# Altium PCB PCB1.PcbDoc
Units mm, origin at the board's own origin, x right, y up, seen from the top; angles counter-clockwise.
Board outline 136.53 x 82.17 mm, 4 copper layers (Top Layer, Layer 1, Layer 2, Bottom Layer), stack 0.603 mm thick; 26 components, 33 nets, 136 pads, 20 vias.
Unrouted connection lines stored in the file: 7.
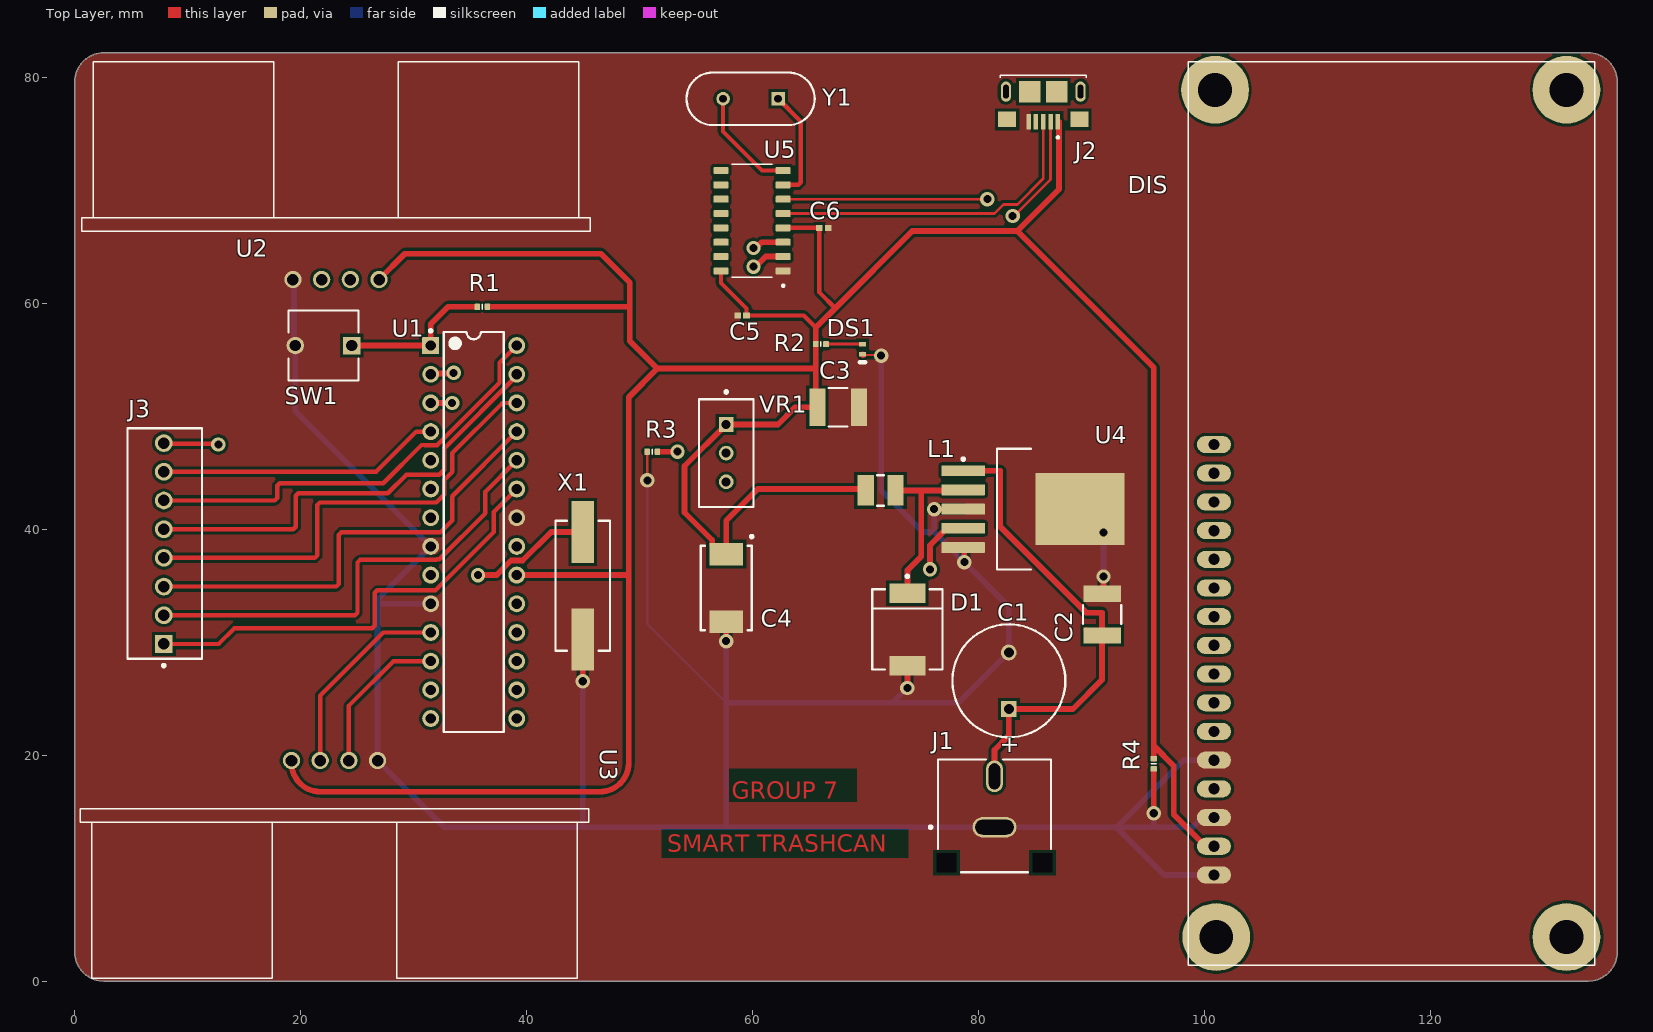
[diagram p0: Top Layer view]
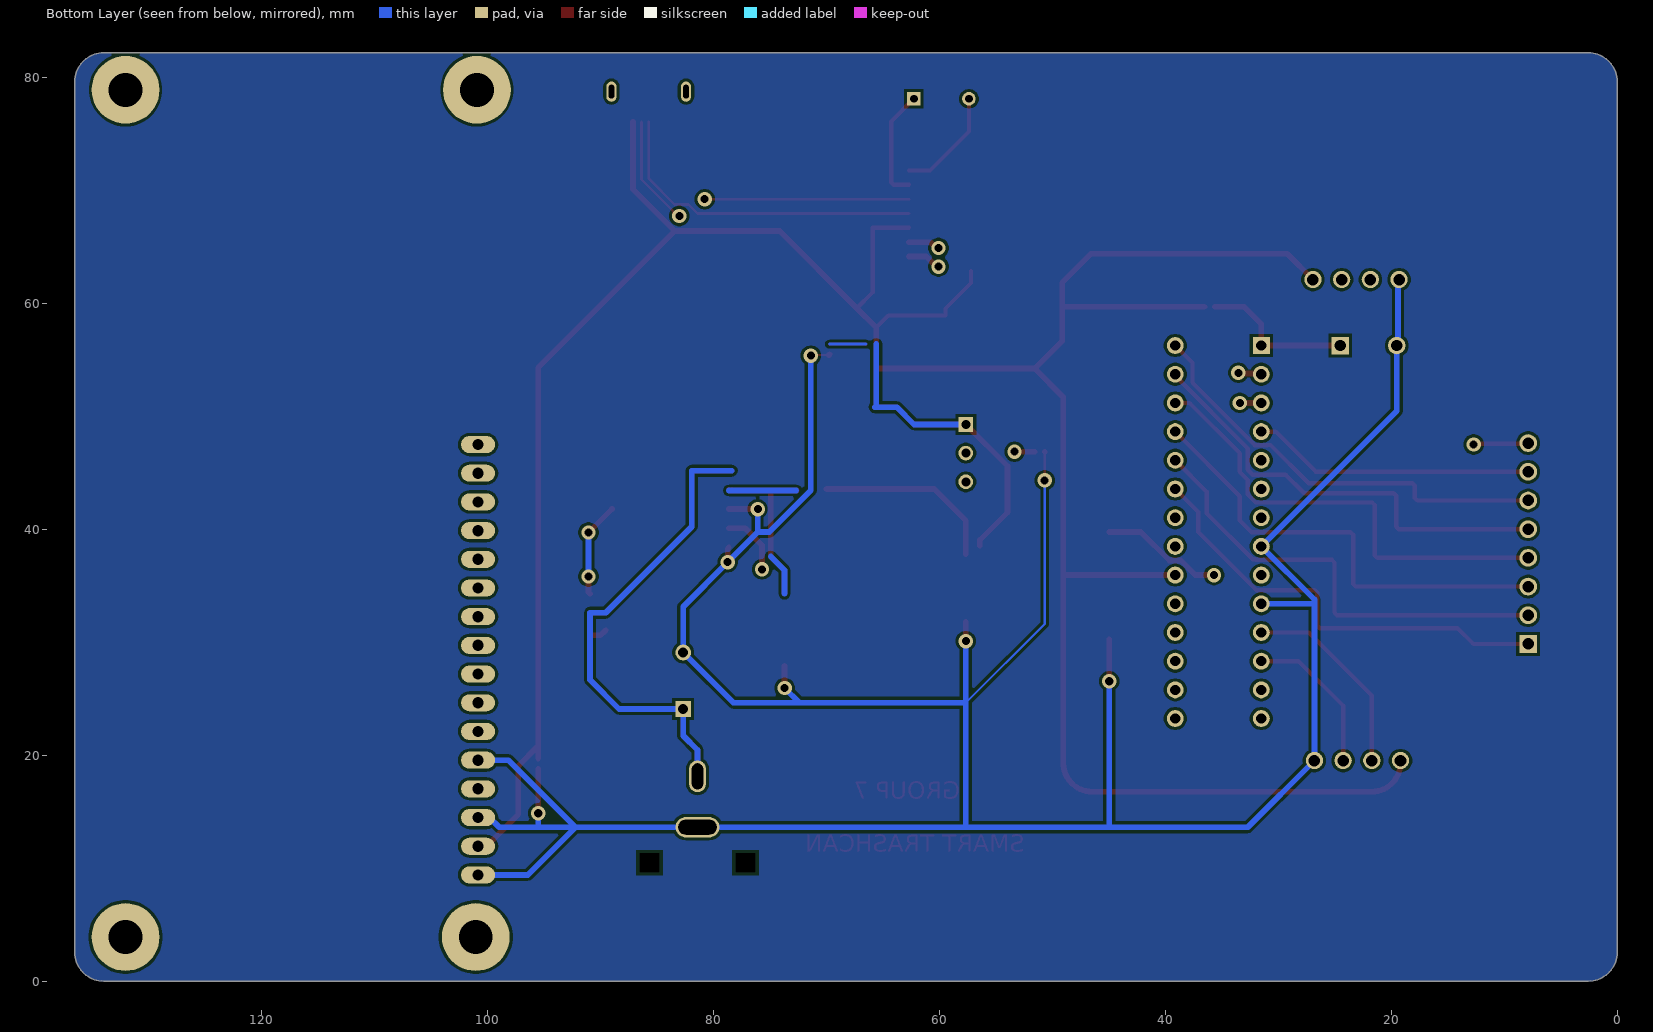
[diagram p1: Bottom Layer view, seen from below]
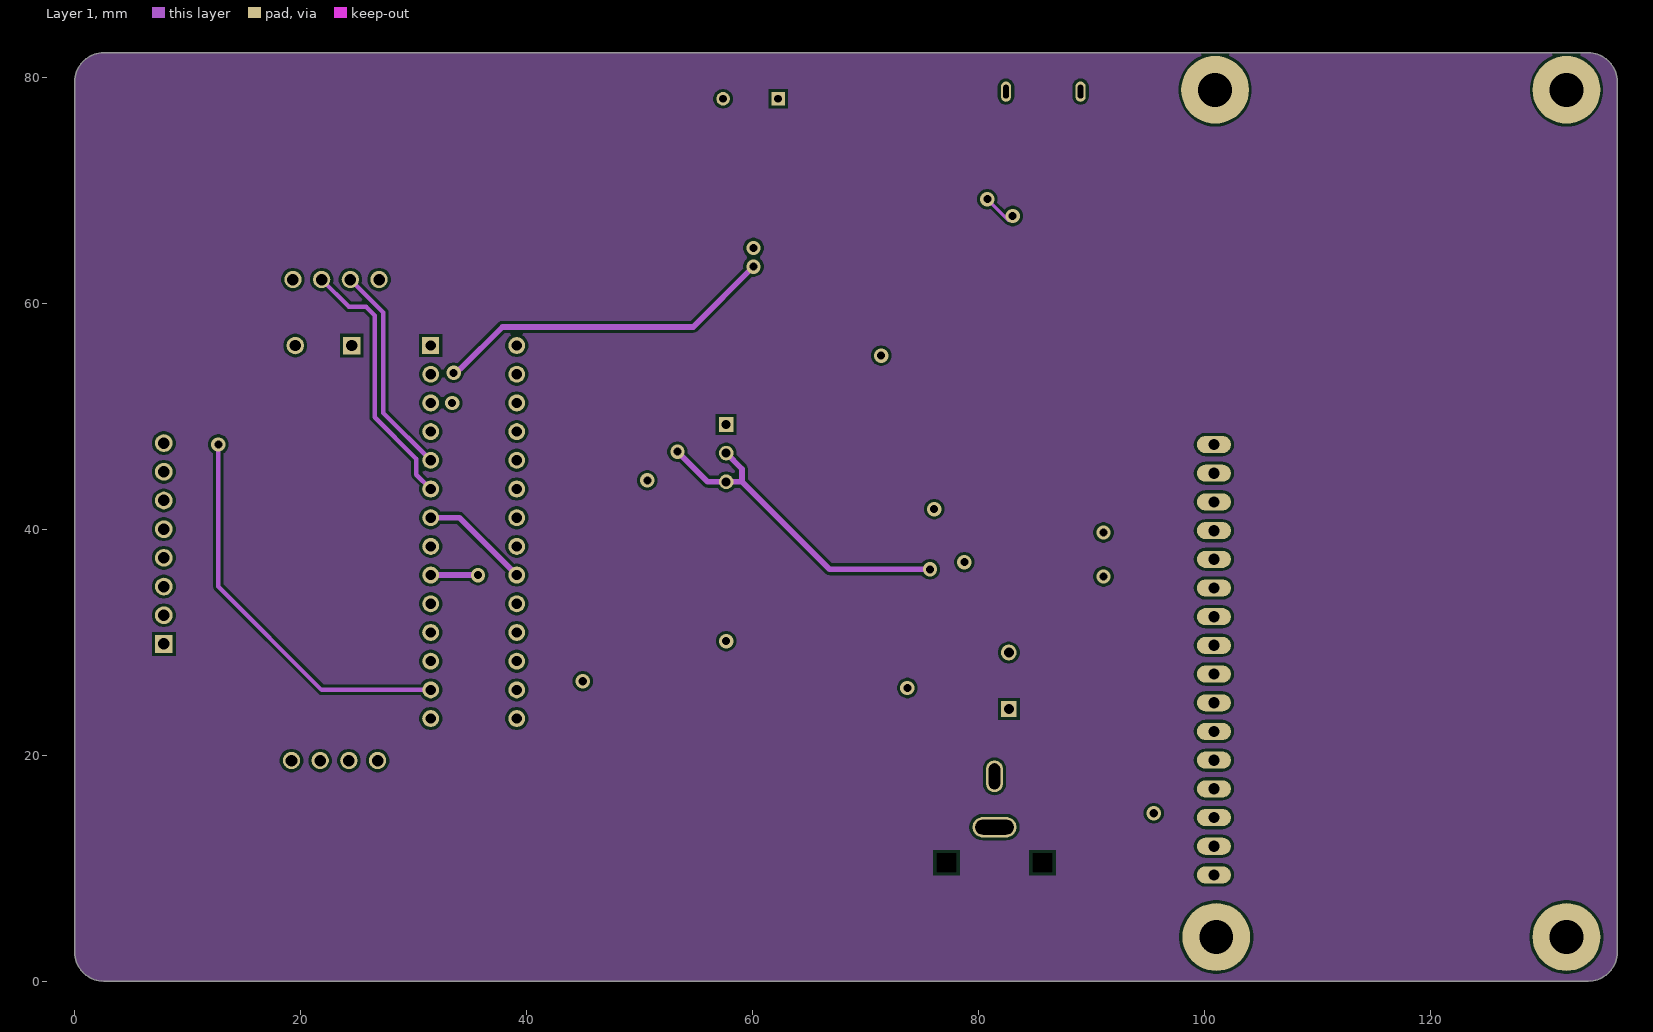
[diagram p2: Layer 1]
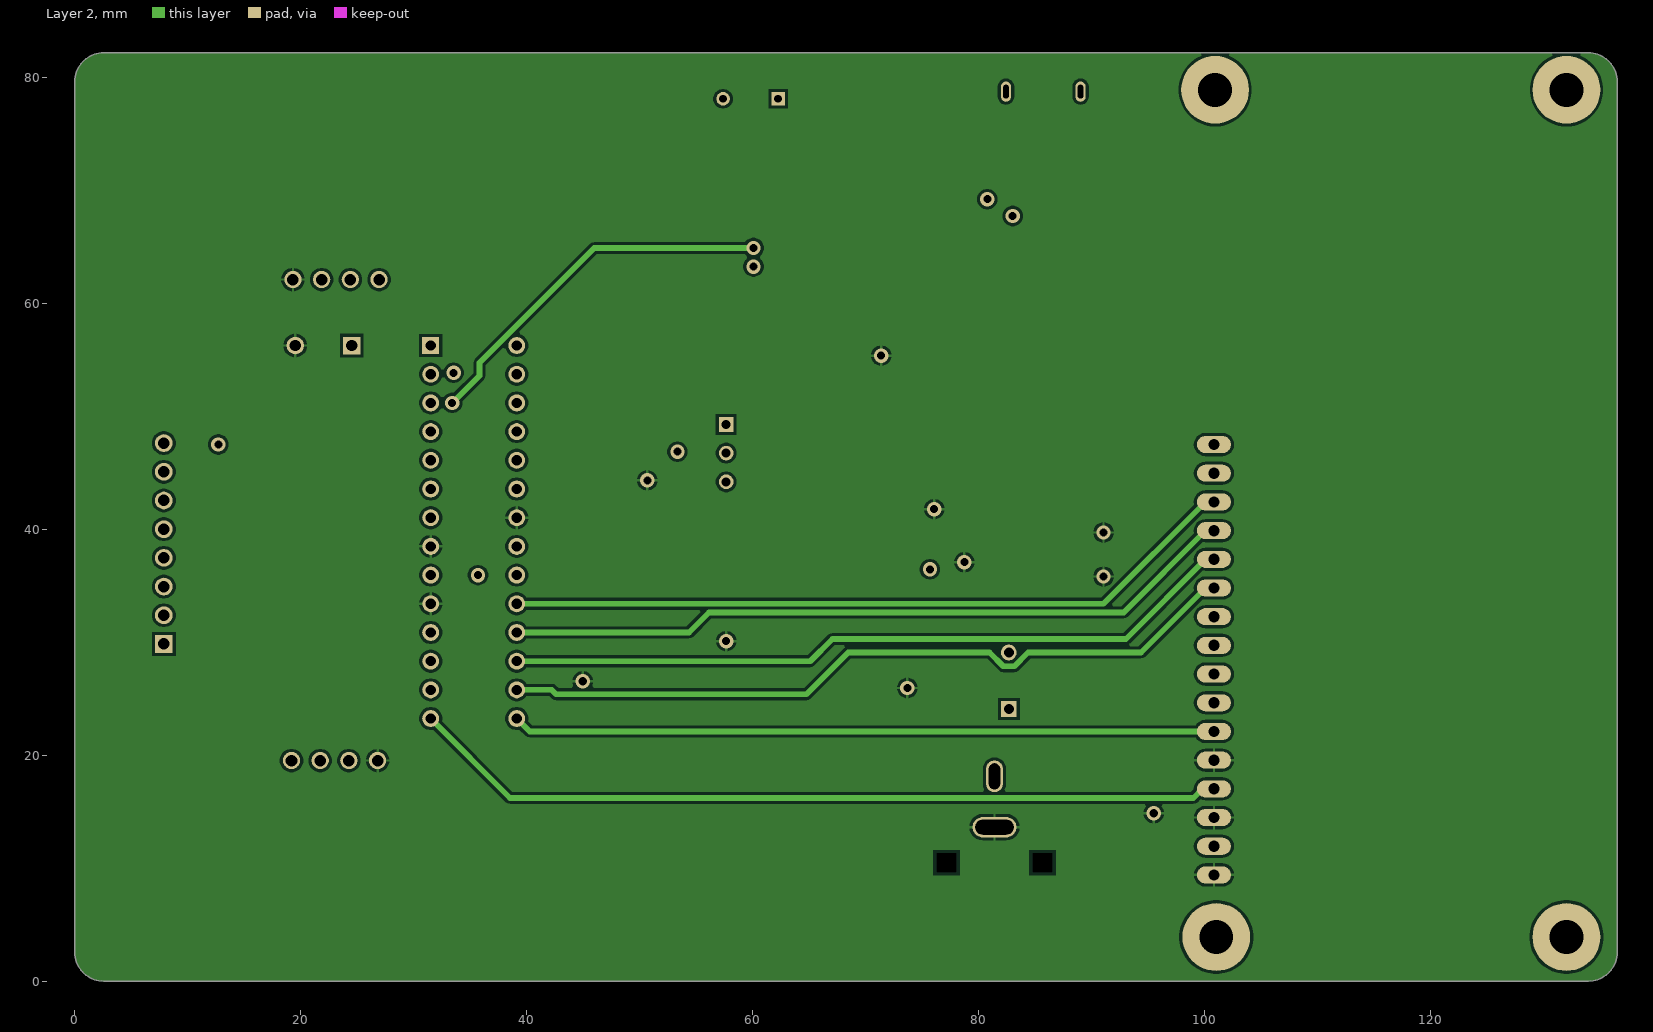
[diagram p3: Layer 2]
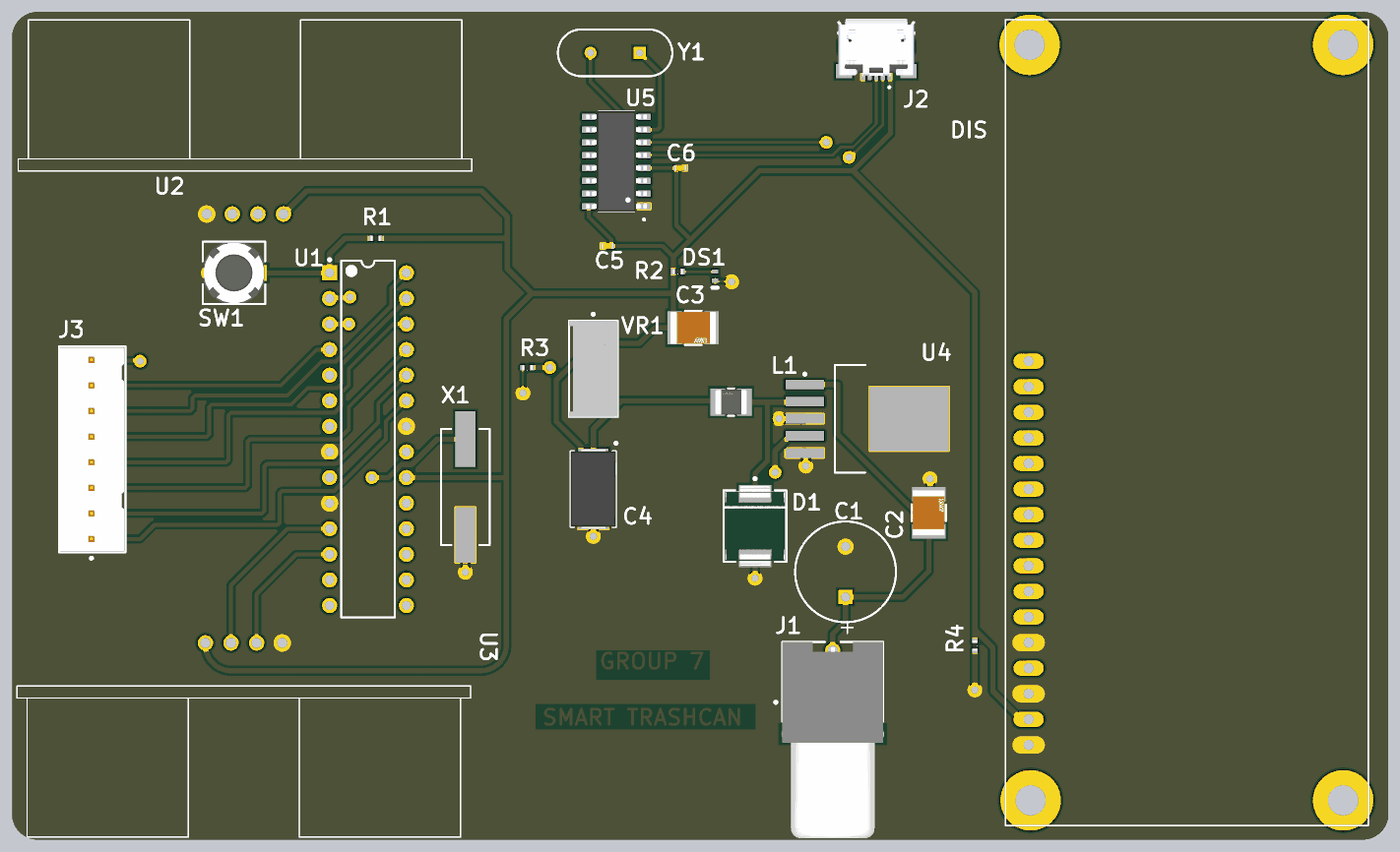
[diagram p4: 3D render of the assembled board from above, using the file's embedded part models]

## Layer stack, top to bottom
Top Solder: solder mask 0.0102, Solder Resist, Dk 3.5
Top Layer: signal copper 0.0356
Dielectric 2: prepreg 0.0711, PP-006, Dk 4.1
Layer 1: signal copper 0.035
Dielectric 1: dielectric 0.32, FR-4, Dk 4.8
Layer 2: signal copper 0.035
Dielectric 3: prepreg 0.0711, PP-006, Dk 4.1
Bottom Layer: signal copper 0.0356
Bottom Solder: solder mask 0.0102, Solder Resist, Dk 3.5

## Board outline
0,79.629 cw(c2.54,79.629) 2.54,82.169 133.985,82.169 cw(c133.985,79.629) 136.525,79.629 136.525,2.54 cw(c133.985,2.54) 133.985,0 2.54,0 cw(c2.54,2.54) 0,2.54 0,11.684

## Design rules (kind name [scope] priority, off if disabled: settings)
Clearance [All] p1: gap=0.254 ignorepadtopadclearanceinfootprint=TRUE
PolygonConnect PolygonConnect_10 [All vs IsNamedPolygon('GND_L01_P011')] p1: connectstyle=Direct reliefconductorwidth=0.254 reliefentries=4 polygonreliefangle="90 Angle" airgapwidth=0.254
PolygonConnect PolygonConnect_9 [All vs IsNamedPolygon('GND_L04_P006')] p2: connectstyle=Direct reliefconductorwidth=0.254 reliefentries=4 polygonreliefangle="90 Angle" airgapwidth=0.254
PolygonConnect PolygonConnect_8 [All vs IsNamedPolygon('GND_L03_P013')] p3: connectstyle=Direct reliefconductorwidth=0.254 reliefentries=4 polygonreliefangle="90 Angle" airgapwidth=0.254
PolygonConnect PolygonConnect_7 [All vs IsNamedPolygon('GND_L02_P012')] p4: connectstyle=Direct reliefconductorwidth=0.254 reliefentries=4 polygonreliefangle="90 Angle" airgapwidth=0.254
PolygonConnect PolygonConnect_6 [All vs IsNamedPolygon('GND_L02_P007')] p5: connectstyle=Direct reliefconductorwidth=0.254 reliefentries=4 polygonreliefangle="90 Angle" airgapwidth=0.254
PolygonConnect PolygonConnect_5 [All vs IsNamedPolygon('GND_L03_P008')] p6: connectstyle=Direct reliefconductorwidth=0.254 reliefentries=4 polygonreliefangle="90 Angle" airgapwidth=0.254
PolygonConnect PolygonConnect_4 [All vs IsNamedPolygon('NONET_L01_P000')] p7: connectstyle=Direct reliefconductorwidth=0.254 reliefentries=4 polygonreliefangle="90 Angle" airgapwidth=0.254
PolygonConnect PolygonConnect_3 [All vs IsNamedPolygon('GND_L04_P006')] p8: connectstyle=Direct reliefconductorwidth=0.254 reliefentries=4 polygonreliefangle="90 Angle" airgapwidth=0.254
PolygonConnect PolygonConnect_2 [All vs IsNamedPolygon('GND_L04_P003')] p9: connectstyle=Direct reliefconductorwidth=0.254 reliefentries=4 polygonreliefangle="90 Angle" airgapwidth=0.254
PolygonConnect PolygonConnect_1 [All vs IsNamedPolygon('NONET_L01_P000')] p10: connectstyle=Direct reliefconductorwidth=0.254 reliefentries=4 polygonreliefangle="90 Angle" airgapwidth=0.254
PolygonConnect [All] p11: connectstyle=Relief reliefconductorwidth=0.254 reliefentries=4 polygonreliefangle="90 Angle" airgapwidth=0.254
RoutingVias [All] p1: holewidth=0.711 width=1.27 viastyle="Through Hole" minholewidth=0.711 minwidth=1.27 maxholewidth=0.711 maxwidth=1.27
SolderMaskExpansion [All] p1: expansion=0.102 istentingtop=FALSE
SupplyNets "Schematic Supply Nets_1" [InNet('GND')] p1: voltage=0.000
UnRoutedNet [All] p1: checkbadconnections=TRUE
Width [All] p1: maxlimit=0.508 minlimit=0.254 preferedwidth=0.381
29 further rules are at their usual default settings.

## Components (designator, comment, footprint, x,y, rotation, side; value= is the part's Value field where it differs from the comment)
C1 "ECA-2AM101" CAPPR65-500-1600X1000X1700 82.677,26.583 r90 top value=100µF
C2 "100nF" FP-1812-L_4_5_0_3-W_3_2_0-IPC_C 90.932,32.448 r90 top
C3 "100nF" FP-1812-L_4_5_0_3-W_3_2_0-IPC_C 67.564,50.8 r0 top
C4 "TPSD227K010R0150" CAPMP7344X31-T_V 57.658,34.798 r270 top value=220µF
C5 "Capacitor 0.1 uF +/- 5% 16 V 0402" CAPC1005X56X25LL10T15 59.064,58.928 r0 top value=0.1µF
C6 "Capacitor 0.1 uF +/- 5% 16 V 0402" CAPC1005X56X25LL10T15 66.294,66.675 r180 top value=0.1µF
D1 "SS34" FP-95402-MFG 73.698,31.129 r270 top
DIS "LCD" 16026-16X2 98.538,1.398 r90 top
DS1 "LED" EVRL-0402-2_V 69.723,55.938 r270 top
J1 "RCJ-041" CUI-RCJ-041_V 81.407,13.625 r0 top
J2 "10118193-0001LF" AMPHENOL_10118193-0001LF 85.725,78.74 r180 top
J3 "HEADERS" FP-22-11-2082-MFG 7.949,38.74 r90 top
L1 "47uH" FP-LB3225-2_5-0_2-IPC_B 71.318,43.434 r180 top
R1 "10KR2F" RESC0402(1005)_L 36.068,59.69 r180 top value=10k
R2 "Resistor 330R +/-5 % 0402 63 mW" RESC0402(1005)_L 66.04,56.388 r180 top value=1k
R3 "Resistor 330R +/-5 % 0402 63 mW" RESC0402(1005)_L 51.112,46.863 r0 top value=330
R4 "10KR2F" RESC0402(1005)_L 95.504,19.246 r90 top value=10k
SW1 "EVQ11Y04K" FP-EVQ11Y04K-MFG 22.011,56.261 r180 top
U1 "ATmega328P-PU" 28P3 35.306,39.751 r0 top
U2 "HC-SR04" XCVR_HC-SR04 23.114,62.103 r180 top
U3 "HC-SR04" XCVR_HC-SR04 22.987,19.525 r0 top
U4 "LM2596S" KTT0005B_L 84.836,41.783 r0 top
U5 "CH340G" SOIC127P600X180-16N 59.944,67.31 r180 top
VR1 "3296W-1-103LF" BOUR-3296W 57.658,46.736 r270 top
X1 "16MHz" FOX-FOXSDLF160-20_V 44.958,35.001 r90 top
Y1 "12MHz" FOX-FOXSLF-2_V 59.817,78.105 r180 top

## Footprints (in the part's own frame and the unit in brackets; to place one, negate y for a bottom-side part, rotate by r counter-clockwise, add the part's x,y. Pads: shape width x height; smd on the part's side, far side on the other; paste and mask are expansions set on the pad)
28P3 [mm] "28-Pin Plastic Dual In-Line Package (PDIP)"
  rect 1.5x1.5 hole 0.9: 1(-3.81,16.51)
  round 1.5 hole 0.9: 2(-3.81,13.97) 3(-3.81,11.43) 4(-3.81,8.89) 5(-3.81,6.35) 6(-3.81,3.81) 7(-3.81,1.27) 8(-3.81,-1.27) 9(-3.81,-3.81) 10(-3.81,-6.35) 11(-3.81,-8.89) 12(-3.81,-11.43) 13(-3.81,-13.97) 14(-3.81,-16.51) 15(3.81,-16.51) 16(3.81,-13.97) 17(3.81,-11.43) 18(3.81,-8.89) 19(3.81,-6.35) 20(3.81,-3.81) 21(3.81,-1.27) 22(3.81,1.27) 23(3.81,3.81) 24(3.81,6.35) 25(3.81,8.89) 26(3.81,11.43) 27(3.81,13.97) 28(3.81,16.51)
  silkscreen extent -3.93,-17.7 2.65,17.93, body extent -3.6,-17.65 3.6,17.65, height 4.58
16026-16X2 [mm]
  round 6 hole 3: MNT1(2.5,-2.5) MNT2(77.5,-2.4) MNT3(2.5,-33.5) MNT4(77.5,-33.5)
  oval 1.508x3.016 hole 1: P$1(8,-2.3) P$2(10.54,-2.3) P$3(13.08,-2.3) P$4(15.62,-2.3) P$5(18.16,-2.3) P$6(20.7,-2.3) P$7(23.24,-2.3) P$8(25.78,-2.3) P$9(28.32,-2.3) P$10(30.86,-2.3) P$11(33.4,-2.3) P$12(35.94,-2.3) P$13(38.48,-2.3) P$14(41.02,-2.3) P$15(43.56,-2.3) P$16(46.1,-2.3)
  silkscreen extent 0,-36 80,0
AMPHENOL_10118193-0001LF [mm]
  rect 0.4x1.35 smd: 1(-1.3,2.675) 2(-0.65,2.675) 3(0,2.675) 4(0.65,2.675) 5(1.3,2.675)
  rect 1.6x1.4 smd: S1(-3.2,2.45) S2(3.2,2.45)
  rect 1.9x1.9 smd: S3(1.2,0) S4(-1.2,0)
  oval 0.9x1.8 hole 0.5 slot 1.2 at 90 deg: S5(-3.3,0) S6(3.3,0)
  silkscreen extent -3.8,-1.45 3.8,4.15, body extent -3.93,-2.76 3.93,2.95, height 2.85
BOUR-3296W [mm] "THD, 3-Leads, Body 9.53x4.83mm, Pitch 2.54mm"
  rect 1.3x1.3 hole 0.8: 1(-2.54,0)
  round 1.3 hole 0.8: 2(0,0) 3(2.54,0)
  silkscreen extent -5.54,-2.41 4.76,2.42, body extent -4.76,-2.4 4.76,2.42, height 11.55
CAPC1005X56X25LL10T15 [mm] "Chip Capacitor, 2-Leads, Body 1.10x0.60mm, IPC High Density"
  rect 0.58x0.54 smd: 1(-0.39,0) 2(0.39,0)
  body extent -0.55,-0.3 0.55,0.3, height 0.56
CAPMP7344X31-T_V [mm] "Molded Capacitor, 2-Leads, Body 7.50x4.5mm"
  rect 2x3 smd: 1(-3,0) 2(3,0)
  silkscreen extent -4.67,-2.25 3.75,2.38, body extent -3.97,-2.25 3.97,2.25, height 3.1
CAPPR65-500-1600X1000X1700 [mm] "THD, 2-Leads, Dia 10mm, Body Length 16mm"
  rect 1.4x1.4 hole 0.9: 1(-2.5,0)
  round 1.4 hole 0.9: 2(2.5,0)
  silkscreen extent -5,-5 5,5, body extent -5,-5 4.95,5, height 17
CUI-RCJ-041_V [mm] "Jack, 2-Leads, Body 19.5x10mm"
  oval 3.9x1.8 hole 1.3 slot 3.4 at 0 deg: 1(0,0)
  oval 1.5x2.8 hole 1 slot 2.3 at 90 deg: 2(0,4.5)
  round 0 hole 1.7 square unplated: MH1(-4.25,-3.15) MH2(4.25,-3.15)
  silkscreen extent -5.77,-4 5,6, body extent -5,-13.5 5,6, height 11.51
EVRL-0402-2_V [mm] "SMD, 2-Leads, Body 1x0.5mm"
  rect 0.4x0.6 smd: 1(-0.45,0) 2(0.45,0)
  silkscreen extent 1.15,-0.25 1.15,0.25, body extent -0.5,-0.25 0.5,0.25, height 0.25
FOX-FOXSDLF160-20_V [mm] "SMD, 2-Leads, Body 5x11.7mm, Height 4.5mm"
  rect 5.5x2 smd: 1(-4.75,0) 2(4.75,0)
  silkscreen extent -5.75,-2.41 5.75,2.41, body extent -6.6,-2.41 6.6,2.41, height 4.5
FOX-FOXSLF-2_V [mm] "THD, 2-Leads, Body 11.35x4.65mm, Pitch 4.88mm"
  rect 1.2x1.2 hole 0.7: 1(-2.44,0)
  round 1.2 hole 0.7: 2(2.44,0)
  silkscreen extent -5.68,-2.32 5.68,2.32, body extent -5.68,-2.33 5.68,2.33, height 3.6
FP-22-11-2082-MFG [mm]
  rect 1.57x1.57 hole 1.02 paste-2539.97 mask+0: 1(-8.895,0.075)
  round 1.57 hole 1.02 paste-2539.97 mask+0: 2(-6.355,0.075) 3(-3.815,0.075) 4(-1.275,0.075) 5(1.265,0.075) 6(3.805,0.075) 7(6.345,0.075) 8(8.885,0.075)
  silkscreen extent -10.93,-3.3 10.21,3.3, body extent -10.31,-3.4 10.31,3.4, height 0.25
FP-1812-L_4_5_0_3-W_3_2_0-IPC_C [mm]
  rect 1.423x3.306 smd paste+0 mask+0: 1(-1.841,0) 2(1.841,0)
  silkscreen extent -0.83,-1.7 0.83,1.7, body extent -2.65,-1.8 2.65,1.8, height 0.25
FP-95402-MFG [mm]
  rect 1.72x3.2 smd paste+0 mask+0: 1(-3.205,0) 2(3.205,0)
  silkscreen extent -4.82,-3.11 3.55,3.11, body extent -4.17,-3.21 4.17,3.21, height 0.25
FP-EVQ11Y04K-MFG [mm]
  rect 1.55x1.55 hole 1 paste-2539.97 mask+0: A(-2.5,0)
  round 1.55 hole 1 paste-2539.97 mask+0: B(2.5,0)
  silkscreen extent -3.1,-3.1 3.1,3.1, body extent -3.37,-3.2 3.37,3.2, height 0.25
FP-LB3225-2_5-0_2-IPC_B [mm]
  rect 1.454x2.706 smd paste+0 mask+0: 1(-1.326,0) 2(1.326,0)
  silkscreen extent -0.3,-1.35 0.3,1.35, body extent -2.3,-1.6 2.3,1.6, height 0.25
KTT0005B_L [mm] "DPAK, 5-Leads, Body 10.65x9.65mm, Pitch 1.7mm, IPC High Density"
  rrect11% 3.85x0.95 smd: 1(-6.2,3.4) 2(-6.2,1.7) 3(-6.2,0) 4(-6.2,-1.7) 5(-6.2,-3.4)
  rrect2% 7.9x6.4 smd: 6(4.15,0)
  silkscreen extent -6.32,-5.35 -0.2,5.35, body extent -3.2,-5.32 6.45,5.33, height 4.83
RESC0402(1005)_L [mm] "Chip Resistor, Body 1.0x0.5mm, IPC High Density"
  rrect25% 0.5x0.55 smd: 1(-0.45,0) 2(0.45,0)
  silkscreen extent 0,-0.2 0,0.2, body extent -0.5,-0.25 0.5,0.25, height 0.3
SOIC127P600X180-16N [mm]
  rrect25% 1.31x0.62 smd: 1(-2.75,4.445) 2(-2.75,3.175) 3(-2.75,1.905) 4(-2.75,0.635) 5(-2.75,-0.635) 6(-2.75,-1.905) 7(-2.75,-3.175) 8(-2.75,-4.445) 9(2.75,-4.445) 10(2.75,-3.175) 11(2.75,-1.905) 12(2.75,-0.635) 13(2.75,0.635) 14(2.75,1.905) 15(2.75,3.175) 16(2.75,4.445)
  silkscreen extent -2.85,-5 1.78,5.85, body extent -3,-5 3,5, height 1.8
XCVR_HC-SR04 [mm]
  round 1.53 hole 1.02: 1(-3.81,0) 2(-1.27,0) 3(1.27,0) 4(3.81,0)
  silkscreen extent -22.5,-19.27 22.5,-4.27

## Part data
C1: library part CMP-001-00034-7, "Aluminum Electrolytic Capacitor, 100 uF, +/- 20%, 100 V, -40 to 85 degC, 2-Pin THD, RoHS, Bulk", Capacitor Type=Electrolytic, Case/Package=Radial, Manufacturer=Panasonic, Max Operating Temperature=85°C, Min Operating Temperature=-40°C, Package Description="2-Pin Through Hole Device, Dia 10 mm, Body Length 16 mm", Package Quantity=200, Package Reference=CAPPR65-500-1600X1000X1700, Ripple Current=350mA, Tolerance=20%, Voltage Rating=100V, Datasheet URL=https://industrial.panasonic.com/cdbs/www-data/pdf/RDF0000/ABA0000C1047.pdf, Datasheet Version=Mar-16, Diameter=10mm, Lead Pitch=5mm, Manufacturer URL=http://www.panasonic.com/, Mounting Technology=TH, Packaging=Bulk, Pins=2, Ripple Current (AC)=350mA, RoHS Compliant=True
C2 C3: library part CMP-1040-01301-2, "General Purpose Ceramic Capacitor, 1812, 100nF, 10%, X7R, 15%, 100V", Case Code (Imperial)=1812, Case Code (Metric)=4532, Dielectric=X7R, Max Operating Temperature=125°C, Min Operating Temperature=-55°C, Package Quantity=1, Tolerance=10%, Voltage=100V, Capacitance=100nF, Case/Package=1812, Construction=Flat, Contact Plating=Tin, Depth=3.2mm, Dissipation Factor=2.5%, Height=1.02mm, Lead Free="Lead Free", Length=4.5mm, Mount="Surface Mount", Number of Pins=2, Packaging="Tape and Reel", Radiation Hardening=No, REACH SVHC="No SVHC", RoHS Compliant=Yes, Series=-, Termination=SMD/SMT, Thickness=0.04inch, Voltage Rating=100V, Voltage Rating (DC)=100V, Width=0.126inch
C4: library part CMP-001-00051-7, "Tantalum Capacitor, 220 uF, +/- 10%, 10 V, -55 to 125 degC, 2917 (7343 Metric), RoHS, Tape and Reel", Capacitor Type=Tantalum, Case/Package=2917, Manufacturer="AVX Corporation", Max Operating Temperature=125°C, Min Operating Temperature=-55°C, Package Description="2-Pin Surface Mount Device, Body 7.3 x 4.35 mm", Package Quantity=1, Package Reference=7343-31, Tolerance=10%, Voltage Rating=10V, Datasheet URL=https://datasheet.ciiva.com/8080/1680477-8080379.pdf, Datasheet Version=42736, Manufacturer URL=http://www.avx.com/, Mounting Technology=SM, Packaging=TapeandReel, Pins=2, RoHS Compliant=True
C5 C6: library part CMP-001-00001-6, "Chip Capacitor, 0.1 uF, +/- 5%, 16 V, 0402 (1005 Metric)", Capacitor Type=Ceramic, Case/Package=0402, Max Operating Temperature=125°C, Min Operating Temperature=-55°C, Tolerance=5%, Voltage Rating=16V, Mounting Technology=SM, Pins=2, RoHS Compliant=True
D1: library part CMP-02539-000012-1, "DIODE SCHOTTKY 40V 3A DO214AB", Forward Current=3A, Manufacturer=Vishay, Manufacturer Part Number=SS34-E3/57T, Max Junction Temp=+150°C, Max Repetitive Reverse Voltage=40V, Max Surge Forward Current=100A, Package=95402, Peak Reverse Current=0.5mA, Temperature="-55°C to +150°C", Temperature Range Low=-55°C, Automotive=No, Category=Diode, ComponentLink2Description=Datasheet, ComponentLink2URL=http://www.vishay.com/docs/88751/ss32.pdf, Device Class L1="Discrete Semiconductors", Device Class L2=Diodes, Device Class L3="Schottky Diodes", Digikey Description="DIODE SCHOTTKY 40V 3A DO214AB", Footprint Url=http://www.vishay.com/docs/95402/smc.pdf, Height=2.62mm, Lead Free=Yes, Mouser Description="Schottky Diodes & Rectifiers 3.0 Amp 40 Volt", Octopart=https://octopart.com/ss34-e3%2F57t-vishay-39552907, RoHS=TRUE, Standoff Height=0mm, Temperature Range High=+150°C
DIS: library part CMP-043-000000-1, "Character LCD Display Module Transflective 5 x 8 Dots STN - Super-Twisted Nematic LED - White Parallel 98.00mm x 60.00mm x 11.60mm", Package=None, Availability=Unavailable, Component Type=Standard, Design Item ID=HD44780, MF="Lumex Opto/Components", MP=HD44780, Pin Count=16, Price=None, SnapEDA_Link=https://www.snapeda.com/parts/HD44780/Lumex%20Opto/Components%20Inc./view-part/44140/?ref=snap, Source=SnapEDAsch.SchLib
DS1: library part CMP-007-00000-2, "Chip LED, White, 5 V, 10 mA, 30 mW, -40 to 85 degC, 2-Pin SMD (0402), RoHS, Tape and Reel", Case/Package=0402, Forward Current=5mA, Forward Voltage=2.6V, Illumination Colour=White, Manufacturer="Everlight Electronics", Max Operating Temperature=85°C, Min Operating Temperature=-40°C, Package Description="2-Pin Surface Mount Device, Body 1 x 0.5 mm", Package Quantity=3000, Power=30mW, Datasheet URL=http://www.everlight.com/file/ProductFile/16-219A-T2D-AR2T1QY-3T.pdf, Datasheet Version="Rev. 5, 04/2013", Luminous Intensity=360mcd, Manufacturer URL=http://www.everlight.com/, Mounting Technology=SM, Package Reference=0402, Packaging=TapeandReel, RoHS Compliant=True, Viewing Angle=130degrees
J1: library part CMP-002-00009-2, "Female RCJ Jack, 2 Position, Height 11.724 mm, Tail Length 4 mm, RoHS, Bulk", Manufacturer="CUI Inc", Max Operating Temperature=85°C, Min Operating Temperature=-20°C, Package Description="Female RCJ Jack, 2 Position, Height 11.724 mm, Tail Length 4 mm", Package Quantity=400, Case/Package=RCJ-041, Connector Type=Audio, Contact Material=Brass, Datasheet URL=http://www.cui.com/product/resource/rcj-04x.pdf, Datasheet Version="Rev. B, 02/2012", Gender=Female, Housing Material=Plastic, Manufacturer URL=http://www.cui.com/, Mounting Technology=TH, Package Reference=RCJ-041, Packaging=Bulk, RoHS Compliant=True, Shielding=Unshielded
J2: library part CMP-002-00074-1, "Right Angle Surface Mount Mount Female USB Connector 100 V ac 1.8A", Case/Package=None, Check_prices=https://www.snapeda.com/parts/10118193-0001LF/Amphenol+FCI/view-part/?ref=eda, Component Type=Standard, Design Item ID=10118193-0001LF, MF="Amphenol ICC", MP=10118193-0001LF, Pins=11, SnapEDA_Link=https://www.snapeda.com/parts/10118193-0001LF/Amphenol+FCI/view-part/?ref=snap, Source=10118193-0001LF.SchLib
J3: library part CMP-04776-001014-1, "CONN HEADER VERT 8POS 2.54MM", Color=White, Contact Resistance=10mR, Current Rating=4A, Flammability Rating="UL94 V-0", Max Current Rating=1A, Max Operating Temperature=75°C, Min Operating Temperature=0°C, Voltage Rating=250V, Approvals=UL, Connector Type="Male Pin", Contact Material=Brass, Contact Mating Length=0.295inch, Contact Plating=Gold, Contact Type="Male Pin", Depth=6.35mm, Fastening Type=Friction, Gender=Male, Height=10.05mm, Housing Color=White, Housing Material=Nylon, Lead Free="Lead Free", Length=20.32mm, Mount="Through Hole", Number of Circuits=8, Number of Contacts=8, Number of Positions=8, Number of Rows=1, Orientation=Straight, Packaging=Bulk, Pitch=2.54mm, Radiation Hardening=No, Series="KK® 6373", Termination=Solder
L1: library part CMP-02424-000224-1, "Commercial Inductors, Low DCR Series 47uH 3.3A 145mΩ 20%", Case/Package=4040, Current Rating=3.3A, DC Resistance (DCR)=145mR, Inductance Tolerance=20%, Max DC Current=3A, Max Operating Temperature=125°C, Min Operating Temperature=-55°C, Package Quantity=1, Self Resonant Frequency=1MHz, Test Frequency=100kHz, Contact Plating=Tin, Core Material=Metal, Depth=10.3mm, Height=4mm, Height - Seated (Max)=0.157inch, Inductance=47uH, Lead Free="Lead Free", Length=0.43inch, Military Standard=Not, Mount="Surface Mount", Number of Pins=2, Packaging="Tape and Reel", Radiation Hardening=No, RMS Current (Irms)=3.3A, Saturation Current=3A, Shielding=Shielded, Termination=SMD/SMT, Tolerance=20%, Width=0.405inch
R1 R4: library part CMP-009-00066-2, "10K 0.063W 1% 0402 (1005 Metric)  SMD", Case/Package=0402, Power=63mW, Tolerance=1%, Mounting Technology=SMT, Pins=2
R2: library part CMP-009-00075-2, "1K 0.063W 5% 0402 (1005 Metric)  SMD", Case/Package=0402, Power=63mW, Tolerance=5%, Mounting Technology=SMT, Pins=2
R3: library part CMP-009-00095-2, "330R 0.063W 5% 0402 (1005 Metric)  SMD", Case/Package=0402, Power=63mW, Tolerance=5%, Mounting Technology=SMT, Pins=2
SW1: library part CMP-05618-000106-1, "SWITCH TACTILE SPST-NO 0.02A 15V", Actuator Color=Black, Case/Package=Radial, Contact Resistance=50mR, Max Operating Temperature=70°C, Max Voltage Rating (DC)=15V, Min Operating Temperature=-20°C, Operating Force=1.6N, Package Quantity=1, Actuator Length=0.4mm, Actuator Type=Standard, Electrical Life=1000000Cycles, Illumination Type=Non-Illuminated, Lead Free="Lead Free", Mechanical Life=1000000Cycles, Mount="Through Hole", Orientation=Straight, Packaging="Tape and Reel", Radiation Hardening=No, RoHS Compliant=Yes, Series=EVQ11, Size=6mm, Switch Function=Off-Mom, Switch Travel=0.25mm, Termination="PC Pin", Throw Configuration=SPST
U1: library part CMP-0095-00013-2, "8-bit AVR Microcontroller, 32KB Flash, 1KB EEPROM, 2KB SRAM, 28-pin PDIP, Industrial Grade (-40°C to 85°C)", ComponentLink1Description="Manufacturer URL", ComponentLink1URL=http://www.atmel.com/, ComponentLink2Description="ATmega48A/48PA/88A/88PA/168A/168PA/328/328P Datasheet", ComponentLink2URL=http://www.atmel.com/dyn/resources/prod_documents/8271.pdf, ComponentLink3Description="ATmega48A/48PA/88A/88PA/168A/168PA/328/328P Summary", ComponentLink3URL=http://www.atmel.com/dyn/resources/prod_documents/8271S.pdf, DatasheetVersion="revD, May-2011", PackageDescription="28-lead (0.300\"/7.62mm Wide) Plastic Dual Inline Package (PDIP)", PackageReference=28P3, PackageVersion="revB, Sep-2001", RevisionNote="DatasheetVersion updated. URLs added."
U2 U3: library part CMP-041-000000-1, "Ultrasonic Sensor Module", Package=None, Availability=Unavailable, Component Type=Standard, Design Item ID=HC-SR04, MP=HC-SR04, Pin Count=4, Price=None, Source=HC-SR04.SchLib
U4: library part CMP-2000-06545-1, "Simple Switcher(R) Power Converter 150 kHz Step-Down Voltage Regulator, 3 A, 4.5 to 40 V, -40 to 125 degC, 5-Pin TO-263 (KTT), Green (RoHS & no Sb/Br), Tape and Reel", Manufacturer="Texas Instruments", Operating Temperature Max=125°C, Operating Temperature Min=-40°C, Operating Temperature Range=-40°Cto+125°C, Output Current=3A, Output Voltage=37V, Package Description="5-Pin Plastic Flange Mount, Body 10.16 x 8.925 mm, Pitch 1.7 mm", Package Reference=KTT5, Package Version="4200577-4/G, 01/2013", PartNumber=LM2596, Primary Input Voltage=40V, Voltage Regulator Case Style=TO-263, Datasheet URL=http://www.ti.com/lit/ds/symlink/lm2596.pdf, Datasheet Version="Rev. C, 04/2013", Manufacturer URL=http://www.ti.com/, Mounting Technology=SurfaceMount, MSL=MSL3-168hours, No. of Outputs=1, No. of Pins=5, Number Of Outputs=1, Package URL=http://www.ti.com/litv/pdf/mpsf007e, SVHC=NoSVHC(19-Dec-2012)
U5: library part CMP-031-000000-1, "USB Interface Integrated Circuit", Package=None, Availability="Not in stock", Check_prices=https://www.snapeda.com/parts/Ch340G/WCH/view-part/?ref=eda, Component Type=Standard, Design Item ID=CH340G, MF=WCH, MP=Ch340G, Pin Count=16, Price=None, SnapEDA_Link=https://www.snapeda.com/parts/Ch340G/WCH/view-part/?ref=snap, Source=CH340G.SchLib
VR1: library part CMP-009-00038-2, "Square Trimpot(R) Trimming Potentiometer, 10 KOhm, +/- 10%, 0.5 W, -55 to 125 degC, 3-Pin THD, RoHS, Tube", Case/Package=3296W, Manufacturer=Bourns, Max Operating Temperature=150°C, Min Operating Temperature=-55°C, Package Description="3-Pin Through Hole Device, Body 9.53 x 4.83 mm, Pitch 2.54 mm", Package Quantity=50, Power=500mW, Resistance=10k, Tolerance=10%, Voltage Rating=300V, Datasheet URL=http://www.bourns.com/docs/Product-Datasheets/3296.pdf, Datasheet Version=May-16, Manufacturer URL=http://www.bourns.com/, Mounting Technology=TH, Package Reference=3296W, Packaging=Rail/Tube, RoHS Compliant=True
X1: library part CMP-003-00024-2, "Resistance Weld SMD Crystal, 16 MHz, +/- 30 ppm, 20 pF, -20 to 70 degC, 2-Pin SMD, RoHS, Tape and Reel", Case/Package=FOX-FOXSDLF160-20, Frequency Tolerance=30ppm, Load Capacitance=20pF, Manufacturer="FOX Electronics", Max Operating Temperature=70°C, Min Operating Temperature=-20°C, Package Description="2-Pin Surface Mount Device, Body 5 x 11.7 mm, Height 4.5 mm", Package Quantity=1, Resistance=40Ohm, Tolerance=50ppm, Datasheet URL=http://foxonline.com/pdfs/hc49sdlf.pdf, Datasheet Version=Mar-15, ESR=40, Frequency=16MHz, Manufacturer URL=http://www.foxonline.com/, Mounting Technology=SM, Package Reference=FOX-FOXSDLF160-20, Packaging=TapeandReel, Pins=2, RoHS Compliant=True
Y1: library part CMP-003-00026-2, "Resistance Weld Thru-Hole Crystal, 12 MHz, +/-30 ppm, 20 pF, -20 to 70 degC, 2-Pin THD, RoHS, Bulk", Case/Package=FOXSLF-2, Frequency Tolerance=30ppm, Load Capacitance=20pF, Manufacturer="FOX Electronics", Max Operating Temperature=70°C, Min Operating Temperature=-20°C, Package Description="2-Pin Through Hole Device, Body 11.35 x 4.65 mm, Pitch 4.88 mm", Package Quantity=100, Resistance=60Ohm, Tolerance=50ppm, Datasheet URL=http://www.foxonline.com/pdfs/hc49slf.pdf, Datasheet Version=Mar-15, ESR=60, Frequency=12MHz, Manufacturer URL=http://www.foxonline.com/, Mounting Technology=TH, Package Reference=FOXSLF-2, Packaging=Bulk, Pins=2, RoHS Compliant=True

## Via types
v1: diameter 1.27, hole 0.711, Top Layer to Bottom Layer, 20 vias

## Nets (pads, with @x,y where several pads share a name; then routed paths per layer and width w, separated by ;. In a path a pad name is that pad's centre, name@x,y a point inside that pad or via, vN(x,y) a via of type N, cw(c..) or ccw(c..) an arc to the next point about the centre after c; other vN are vias at no path point)
"5V OUTPUT": C5.2 C6.2 DIS.P$2 J2.1 R1.1 R4.2 U1.7 U1.20 U2.1 U3.1 U5.4 U5.16 | length 325.9
  Top Layer w0.381: U5.16 57.194,61.805 59.454,59.545 C5.2 64.516,58.928 65.59,57.854 ; U5.4 C6.2 65.904,60.969 67.305,59.568
  Top Layer w0.508: U3.1 19.177,19.304 ccw(c21.717,19.304) 21.717,16.764 46.482,16.764 ccw(c46.482,19.304) 49.022,19.304 49.022,35.941 ; U2.1 29.21,64.389 46.58,64.389 49.12,61.849 49.12,59.69 ; R1.1 49.12,59.69 ; U1.20 49.022,35.941 ; 56.412,38.544 56.412,39.044 53.975,41.481 53.975,45.593 57.658,49.276 62.23,49.276 63.754,50.8 65.723,50.8 65.59,50.933 65.59,54.229 ; 57.658,37.798 57.658,40.767 60.452,43.561 69.992,43.561 ; J2.1@87.122,76.065 87.122,70.104 83.417,66.399 ; R4.2 95.504,20.828 ; DIS.P$2 100.084,11.938 97.282,14.74 97.282,19.05 95.504,20.828 ; 49.022,35.941 49.022,51.689 51.562,54.229 ; 49.12,59.69 49.12,56.671 51.562,54.229 ; 51.562,54.229 65.59,54.229 ; 65.59,54.229 65.59,57.854 67.305,59.568 74.135,66.399 83.417,66.399 ; 83.417,66.399 95.504,54.312 95.504,20.828
  Layer 1 w0.508: U1.7 34.036,41.021 U1.20
  Bottom Layer w0.508: 57.658,49.276 62.23,49.276 63.754,50.8 65.723,50.8 ; 65.59,50.933 65.59,56.388
D+: J2.3 U5.5 | length 29.3
  Top Layer w0.254: U5.5 62.709,67.96 81.422,67.96 82.209,68.747 83.432,68.747 85.725,71.04 J2.3
D-: J2.2 U5.6 | length 31.6
  Top Layer w0.254: U5.6 v1(80.772,69.215) ; v1(83.018,67.731) 83.541,67.731 83.541,68.137 86.375,70.971 J2.2
  Layer 1 w0.254: v1(80.772,69.215) 82.677,67.31 83.018,67.31 v1(83.018,67.731)
GND: C1.2 C2.2 C3.2 C4.2 C5.1 C6.1 D1.2 DIS.P$1 DIS.P$3 DIS.P$5 DS1.2 J1.1 J2.5 R3.1 R4.1 SW1.B U1.8 U1.10 U1.22 U2.4 U3.4 U4.3 U4.5 U4.6 U5.1 X1.1 | length 296.1
  Top Layer w0.208: v1@50.666,44.33 R3.1@50.666,46.859 ; DS1.2@69.769,55.434 69.773,55.43 71.316,55.43 v1(71.374,55.372)
  Top Layer w0.508: v1(44.958,26.543) X1.1 ; R3.1 R3.1@50.666,46.859 ; v1@50.666,44.33 v1(50.673,44.323) ; v1(57.658,30.099) C4.2 ; DS1.2 69.723,55.48 DS1.2@69.769,55.434 ; v1(73.698,25.946) D1.2 ; v1(76.073,41.783) U4.3 ; U4.5 78.74,38.279 v1(78.74,37.084) ; U4.6 v1(91.059,39.71) ; C2.2 91.059,34.415 v1(91.059,35.814) ; v1(95.504,14.859) R4.1
  Bottom Layer w0.208: v1(50.673,44.323) 50.673,31.623 57.658,24.638
  Bottom Layer w0.508: U2.4 19.407,62 19.407,56.364 SW1.B 19.511,50.466 U1.8 26.797,33.782 26.797,33.401 ; U1.10 26.797,33.401 ; v1(44.958,26.543) 44.958,13.752 44.831,13.625 ; v1(57.658,30.099) 57.658,24.638 ; v1(71.374,55.372) 71.374,43.434 75.057,39.751 76.073,39.751 ; v1(73.698,25.946) 72.39,24.638 ; v1(76.073,41.783) 76.073,39.751 ; v1(91.059,35.814) v1(91.059,39.71) ; v1(95.504,14.859) 95.504,13.702 95.581,13.625 ; DIS.P$1 96.429,9.398 92.202,13.625 ; DIS.P$3 99.813,14.478 98.96,13.625 95.581,13.625 ; DIS.P$5 98.135,19.558 92.202,13.625 ; 26.797,33.401 U3.4 32.697,13.625 44.831,13.625 ; 44.831,13.625 57.658,13.625 ; 57.658,13.625 57.658,24.638 ; 57.658,13.625 J1.1 92.202,13.625 ; 57.658,24.638 72.39,24.638 ; 72.39,24.638 78.232,24.638 C1.2 82.677,33.147 v1(78.74,37.084) 76.073,39.751 ; 92.202,13.625 95.581,13.625
NetC1_1: C1.1 C2.1 J1.2 U4.1 | length 86.4
  Top Layer w0.508: U4.1@78.382,45.183 81.915,45.183 81.915,40.222 89.533,32.604 90.932,32.604 C2.1 ; J1.2 81.407,20.447 82.677,21.717 C1.1 88.345,24.083 90.932,26.67 C2.1 ; C2.1@89.533,31.065 89.99,30.607 C2.1
  Bottom Layer w0.508: 78.382,45.183 81.915,45.183 81.915,40.222 89.533,32.604 90.932,32.604 90.932,30.607 90.932,26.67 88.345,24.083 C1.1 82.677,21.717 81.407,20.447 J1.2
NetC3_1: C3.1 C4.1 L1.2 R2.2 VR1.1
NetD1_1: D1.1 L1.1 U4.2 | length 15.7
  Top Layer w0.508: L1.1 74.93,43.434 ; D1.1 73.698,36.36 74.93,37.592 74.93,43.434 ; U4.2@78.382,43.483 U4.2@78.333,43.434 ; U4.2 78.587,43.434 U4.2@78.333,43.434 ; 74.93,43.434 U4.2@78.333,43.434
NetDS1_1: DS1.1 R2.1 | length 3.3
  Top Layer w0.254: R2.1@66.514,56.364 R2.1 DS1.1 DS1.1@69.699,56.364
NetR1_2: R1.2 SW1.A U1.1 | length 13.8
  Top Layer w0.508: SW1.A@24.638,56.388 SW1.A U1.1 31.496,58.166 33.02,59.69 R1.2
NetR3_2: R3.2 U4.4 VR1.2 VR1.3 | length 37.3
  Top Layer w0.508: R3.2 v1(53.34,46.863) ; v1(75.692,36.449) 75.692,38.589 77.186,40.083 U4.4
  Layer 1 w0.508: v1(53.34,46.863) 56.007,44.196 VR1.3 59.055,44.196 ; VR1.2 59.055,45.339 59.055,44.196 ; v1(75.692,36.449) 66.802,36.449 59.055,44.196
NetU1_9: U1.9 X1.2 | length 15
  Top Layer w0.508: v1(35.687,35.941) 37.337,35.941 38.619,37.223 39.637,37.223 42.165,39.751 X1.2
  Layer 1 w0.508: U1.9 v1(35.687,35.941)
NetU5_7: U5.7 Y1.1 | length 9.9
  Top Layer w0.381: Y1.1 64.262,76.1 64.262,70.708 64.039,70.485 U5.7
NetU5_8: U5.8 Y1.2 | length 9.6
  Top Layer w0.381: Y1.2 57.377,75.211 60.833,71.755 U5.8
PB0: DIS.P$4 U1.14 | length 72.6
  Layer 2 w0.508: U1.14 38.52,16.217 99.012,16.217 99.813,17.018 DIS.P$4
PB1: DIS.P$6 U1.15 | length 62.2
  Layer 2 w0.508: U1.15 40.259,22.098 DIS.P$6
PB2: DIS.P$11 U1.16 | length 66.8
  Layer 2 w0.508: U1.16 42.217,25.781 42.598,25.4 64.77,25.4 68.453,29.083 80.969,29.083 82.177,27.875 83.177,27.875 84.385,29.083 94.369,29.083 100.084,34.798 DIS.P$11
PB3: DIS.P$12 U1.17 | length 65.5
  Layer 2 w0.508: U1.17 65.09,28.321 67.06,30.291 93.037,30.291 100.084,37.338 DIS.P$12
PB4: DIS.P$13 U1.18 | length 65.5
  Layer 2 w0.508: U1.18 54.356,30.861 56.134,32.639 92.845,32.639 100.084,39.878 DIS.P$13
PB5: DIS.P$14 U1.19 | length 65.5
  Layer 2 w0.508: U1.19 91.067,33.401 100.084,42.418 DIS.P$14
PC0: J3.1 U1.23 | length 39.7
  Top Layer w0.381: J3.1 12.725,29.845 14.122,31.242 26.32,31.242 26.543,31.465 26.543,34.372 26.766,34.596 31.93,34.596 37.084,39.75 37.084,41.529 U1.23
PC1: J3.2 U1.24 | length 40.6
  Top Layer w0.381: J3.2 24.796,32.385 25.019,32.608 25.019,37.063 25.242,37.286 31.991,37.286 32.042,37.338 32.258,37.338 36.322,41.402 36.322,43.307 U1.24
PC2: J3.3 U1.25 | length 40.7
  Top Layer w0.381: J3.3 23.145,34.925 23.368,35.148 23.368,39.516 23.591,39.739 32.373,39.739 33.401,40.767 33.401,42.926 U1.25
PC3: J3.4 U1.26 | length 41.3
  Top Layer w0.381: J3.4 21.24,37.465 21.463,37.688 21.463,42.143 21.686,42.366 31.991,42.366 32.691,43.066 32.691,44.365 33.401,45.076 33.401,46.736 37.846,51.181 U1.26
PC4: J3.5 U1.27 | length 39.7
  Top Layer w0.381: J3.5 19.335,40.005 19.558,40.228 19.558,42.957 19.781,43.18 27.695,43.18 29.346,44.831 32.258,44.831 32.691,45.264 32.691,47.159 39.116,53.585 U1.27
PC5: J3.6 U1.28 | length 38.6
  Top Layer w0.381: J3.6 17.684,42.545 17.907,42.768 17.907,43.846 18.13,44.069 27.305,44.069 30.684,47.448 31,47.448 31.001,47.446 32.079,47.446 37.592,52.959 37.592,54.737 U1.28
PD2: J3.7 U1.4 | length 25.1
  Top Layer w0.381: J3.7 26.67,45.085 30.226,48.641 U1.4
PD3: U1.5 U2.2 | length 18.9
  Layer 1 w0.381: U2.2 27.305,59.182 27.305,50.292 U1.5
PD4: U1.6 U2.3 | length 23.4
  Layer 1 w0.381: U2.3 24.257,59.69 25.781,59.69 26.543,58.928 26.543,49.911 30.226,46.228 30.226,44.831 U1.6
PD5: U1.11 U3.2 | length 17.8
  Top Layer w0.381: U3.2 21.717,25.273 27.305,30.861 U1.11
PD6: U1.12 U3.3 | length 13.7
  Top Layer w0.381: U3.3 24.257,24.384 28.194,28.321 U1.12
PD7: J3.8 U1.13 | length 40
  Top Layer w0.381: J3.8 7.938,47.561 12.636,47.561 v1(12.7,47.498)
  Layer 1 w0.381: v1(12.7,47.498) 12.7,34.925 21.844,25.781 U1.13
RX: U1.3 U5.3 | length 37.8
  Top Layer w0.508: U1.3 v1(33.401,51.181) ; v1(60.071,64.897) 60.277,64.897 60.785,65.405 U5.3
  Layer 2 w0.508: v1(33.401,51.181) 35.814,53.594 35.814,54.738 45.973,64.897 v1(60.071,64.897)
TX: U1.2 U5.2 | length 35.5
  Top Layer w0.508: U1.2 31.559,53.785 33.465,53.785 v1(33.528,53.848) ; v1(60.071,63.246) 60.269,63.246 61.158,64.135 U5.2
  Layer 1 w0.508: v1(33.528,53.848) 33.734,53.848 34.087,54.201 34.135,54.201 37.846,57.912 54.737,57.912 v1(60.071,63.246)
pads on no net: DIS.MNT1 DIS.MNT2 DIS.MNT3 DIS.MNT4 DIS.P$7 DIS.P$8 DIS.P$9 DIS.P$10 DIS.P$15 DIS.P$16 J1.MH1 J1.MH2 J2.4 J2.S1 J2.S2 J2.S3 J2.S4 J2.S5 J2.S6 U1.21 U5.9 U5.10 U5.11 U5.12 U5.13 U5.14 U5.15
copper on no net: | length 13
  Bottom Layer w0.254: 66.49,56.388 69.723,56.388
  Bottom Layer w0.508: 72.67,43.434 76.327,43.434 78.613,43.434 ; 73.702,34.302 73.702,36.364 74.93,37.592

## Polygon pours and split planes (outlines as drawn)
no net on Bottom Layer "NONET_L04_P004" (solid, pour order 4): 0,79.629 cw(c2.54,79.629) 2.54,82.169 133.985,82.169 cw(c133.985,79.629) 136.525,79.629 136.525,2.54 cw(c133.985,2.54) 133.985,0 2.54,0 cw(c2.54,2.54) 0,2.54 0,15.24
GND on Top Layer "GND_L01_P000" (solid, pour order 0): 0,79.629 cw(c2.54,79.629) 2.54,82.169 133.985,82.169 cw(c133.985,79.629) 136.525,79.629 136.525,2.54 cw(c133.985,2.54) 133.985,0 2.54,0 cw(c2.54,2.54) 0,2.54 0,5.334
no net on Layer 1 "NONET_L02_P005" (solid, pour order 5): 0,79.629 cw(c2.54,79.629) 2.54,82.169 133.985,82.169 cw(c133.985,79.629) 136.525,79.629 136.525,2.54 cw(c133.985,2.54) 133.985,0 2.54,0 cw(c2.54,2.54) 0,2.54 0,4.699
GND on Layer 2 "GND_L03_P006" (solid, pour order 6): 0,79.629 cw(c2.54,79.629) 2.54,82.169 133.985,82.169 cw(c133.985,79.629) 136.525,79.629 136.525,2.54 cw(c133.985,2.54) 133.985,0 2.54,0 cw(c2.54,2.54) 0,2.54 0,6.096

## Other copper
Top Layer:
  text "GROUP 7" at 58.166,16.129 h1.52
  text "SMART TRASHCAN" at 52.451,11.43 h1.52

## Text inside footprints (layer, text, board x,y; h text height)
C1: Top Overlay "+" at 83.427,20.033 h1.5 r90
DIS: Mechanical 13 "BEZEL" at 104.545,68.98 h0.81 r90; Mechanical 13 "VISIBLE AREA" at 109.694,69.027 h0.81 r90; Mechanical 13 "CHARACTER AREA" at 111.24,68.908 h0.81 r90
J1: Mechanical 1 "PCB Edge" at 87.407,9.825 h0.6
J2: Mechanical 13 "PCB END" at 80.875,79.94 h0.41 r180